# Altium PCB WARG EE Bootcamp.PcbDoc
Units mil, origin at the board's own origin, x right, y up, seen from the top; angles counter-clockwise.
Board outline 6000 x 4000 mil, 4 copper layers (Top Layer, GND, Vcc, Bottom Layer), stack 26.156 mil thick; 36 components, 24 nets, 152 pads, 0 vias.
Unrouted connection lines stored in the file: 82.
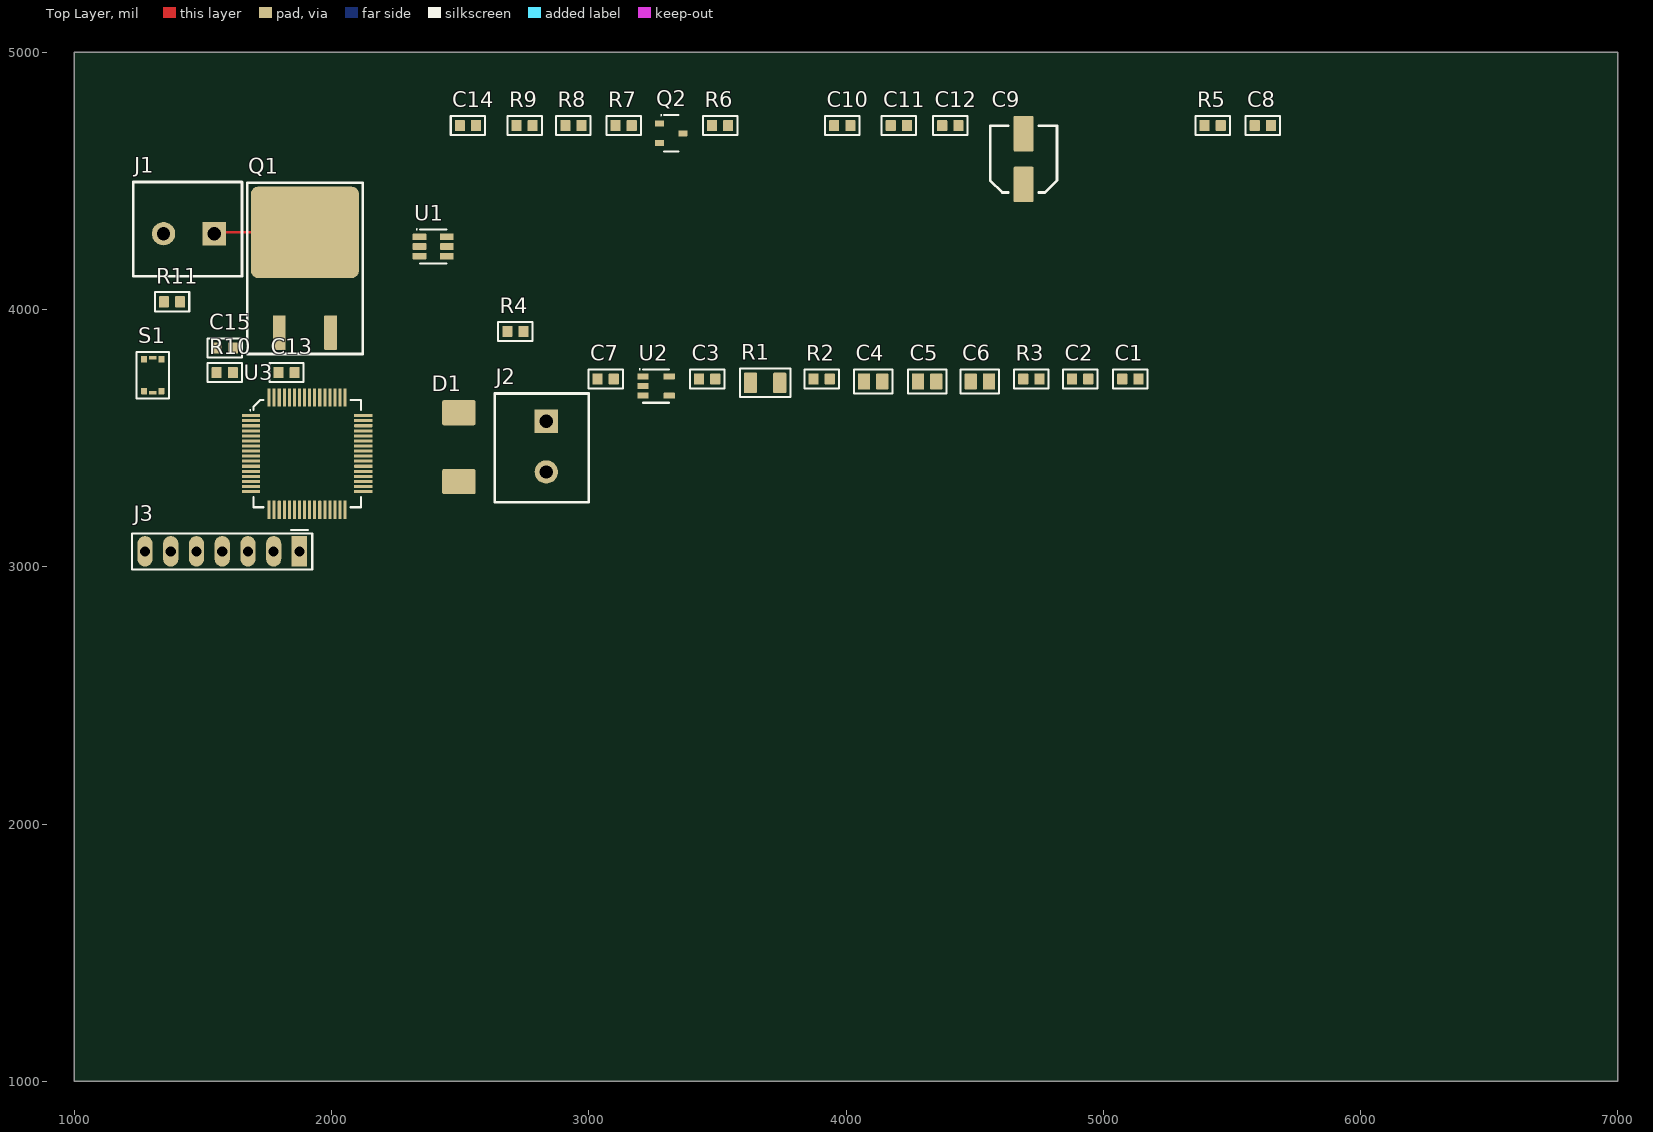
[diagram p0: Top Layer view]
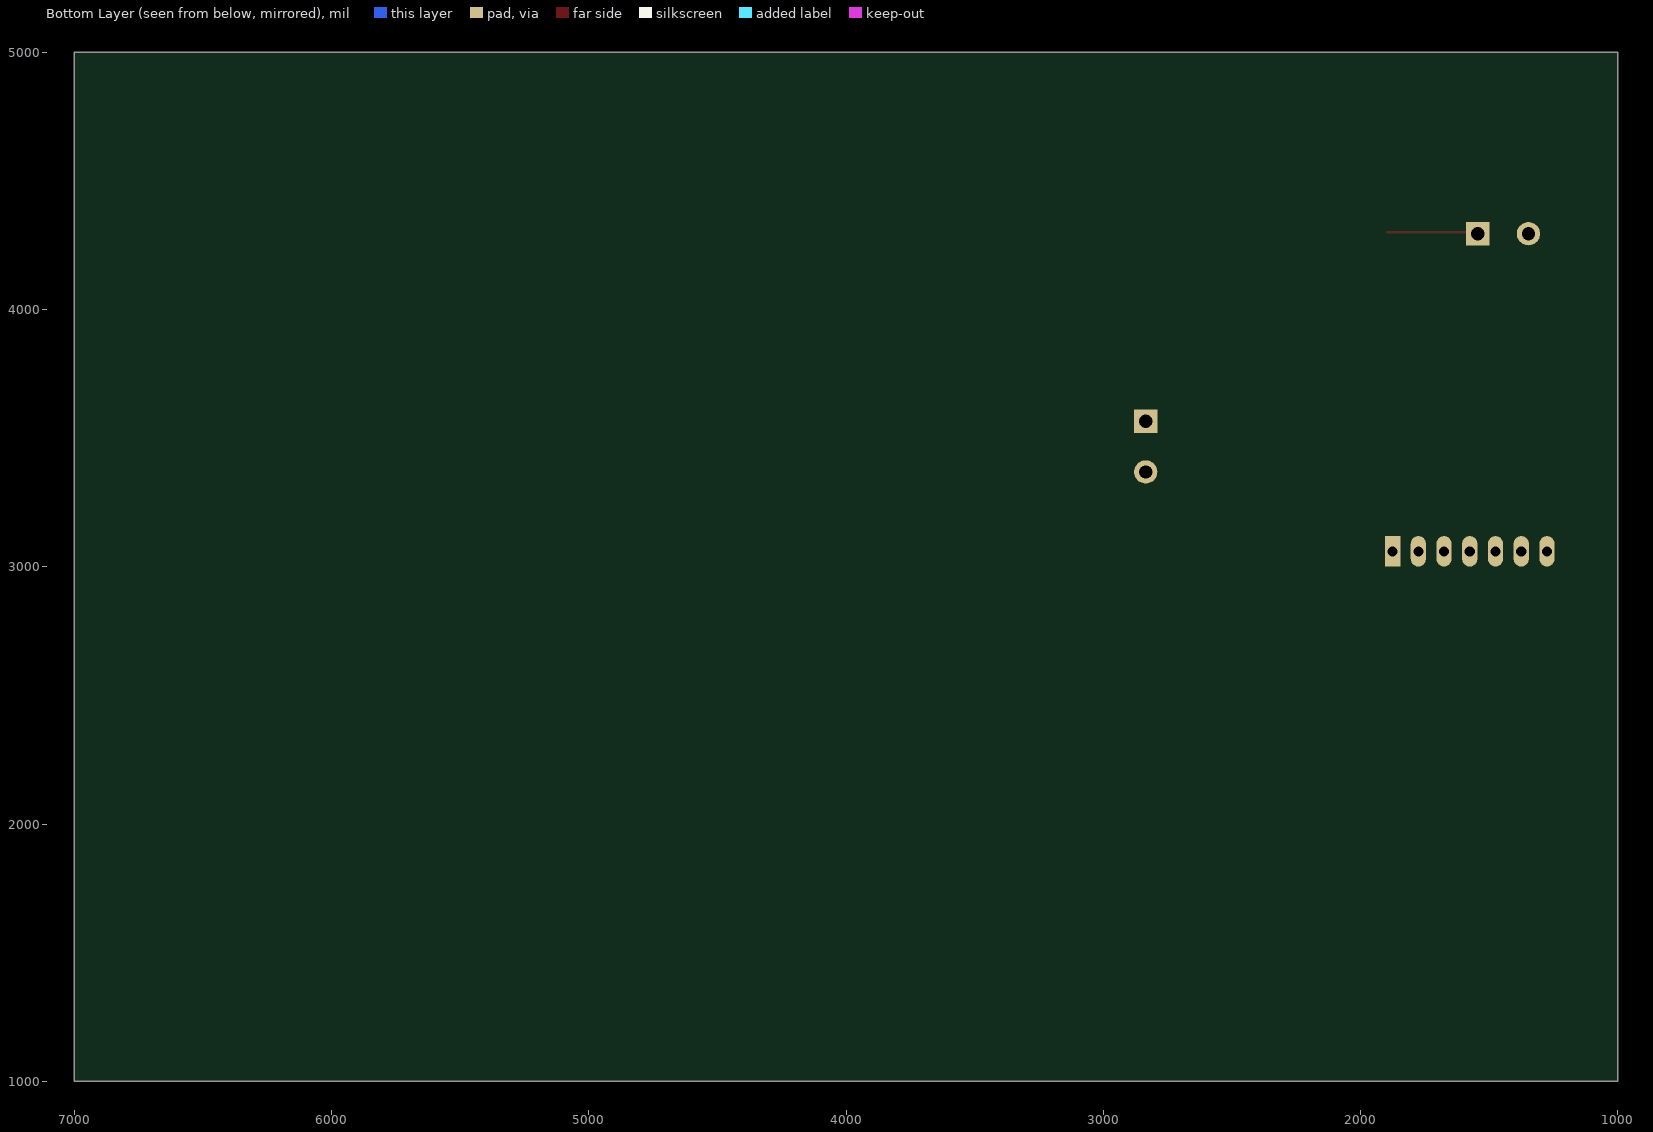
[diagram p1: Bottom Layer view, seen from below]
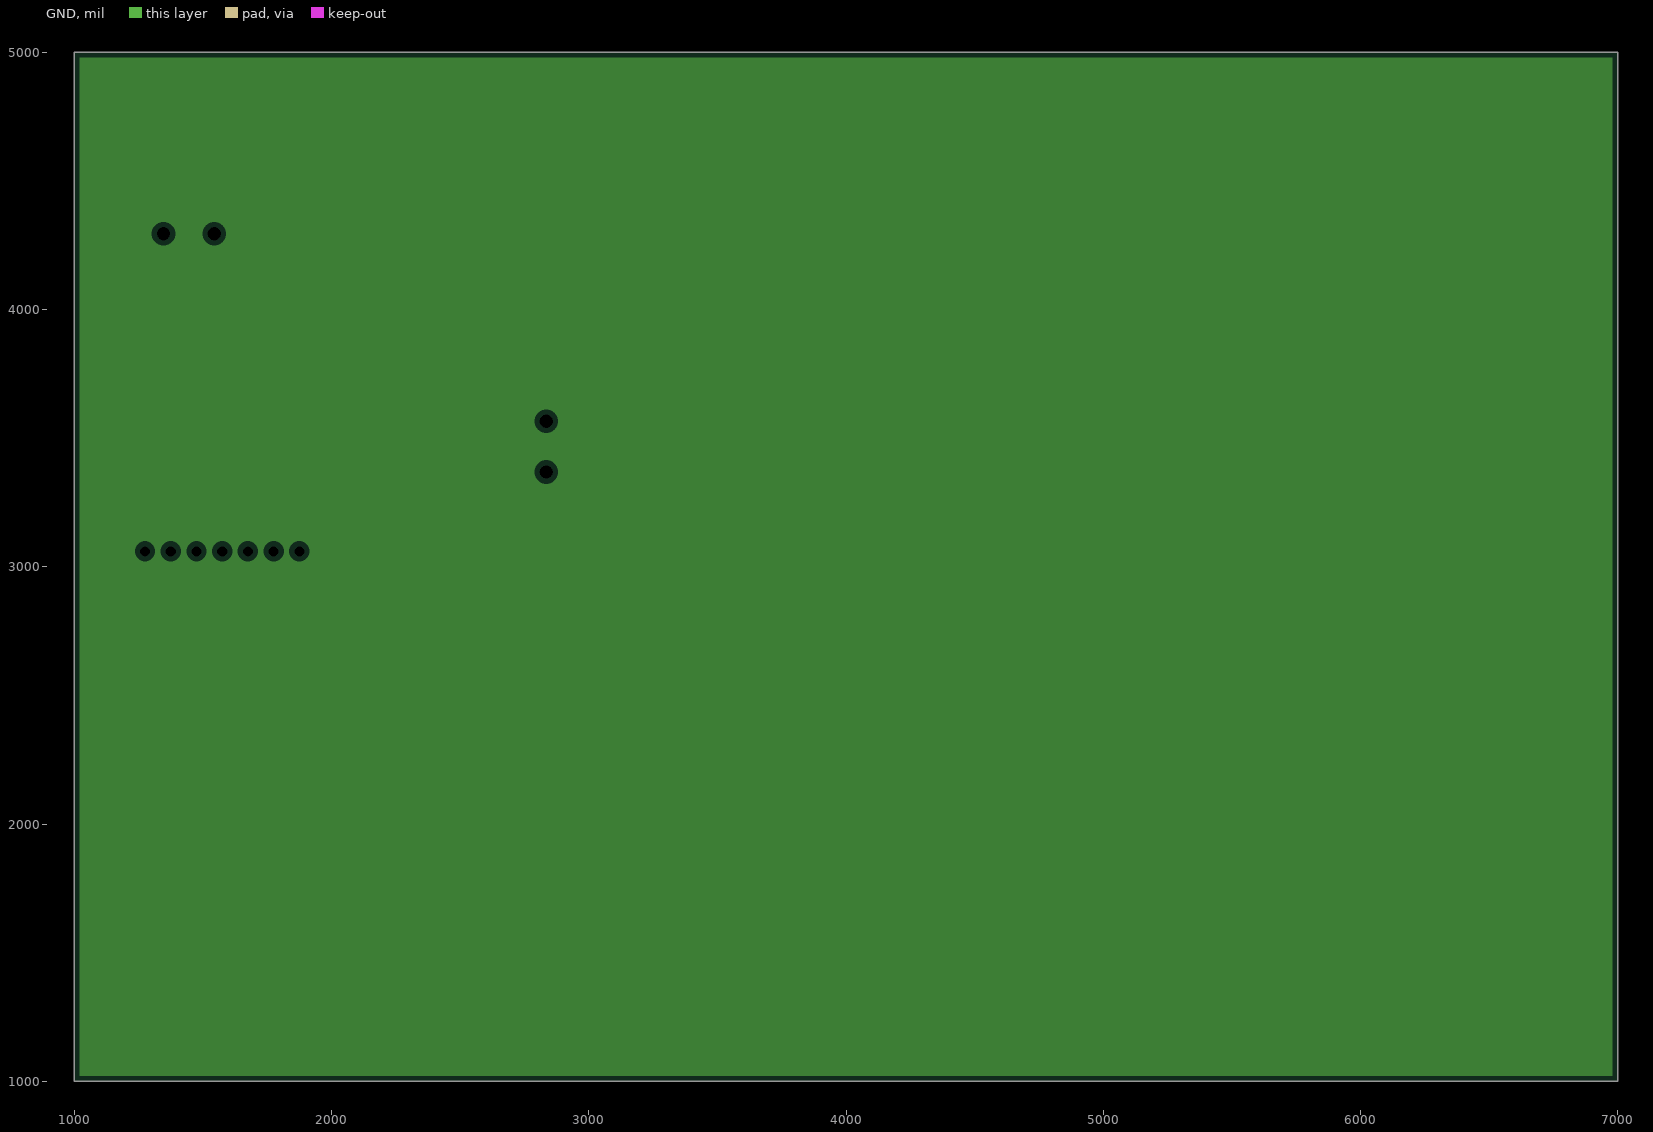
[diagram p2: GND, clearances drawn from the general rule]
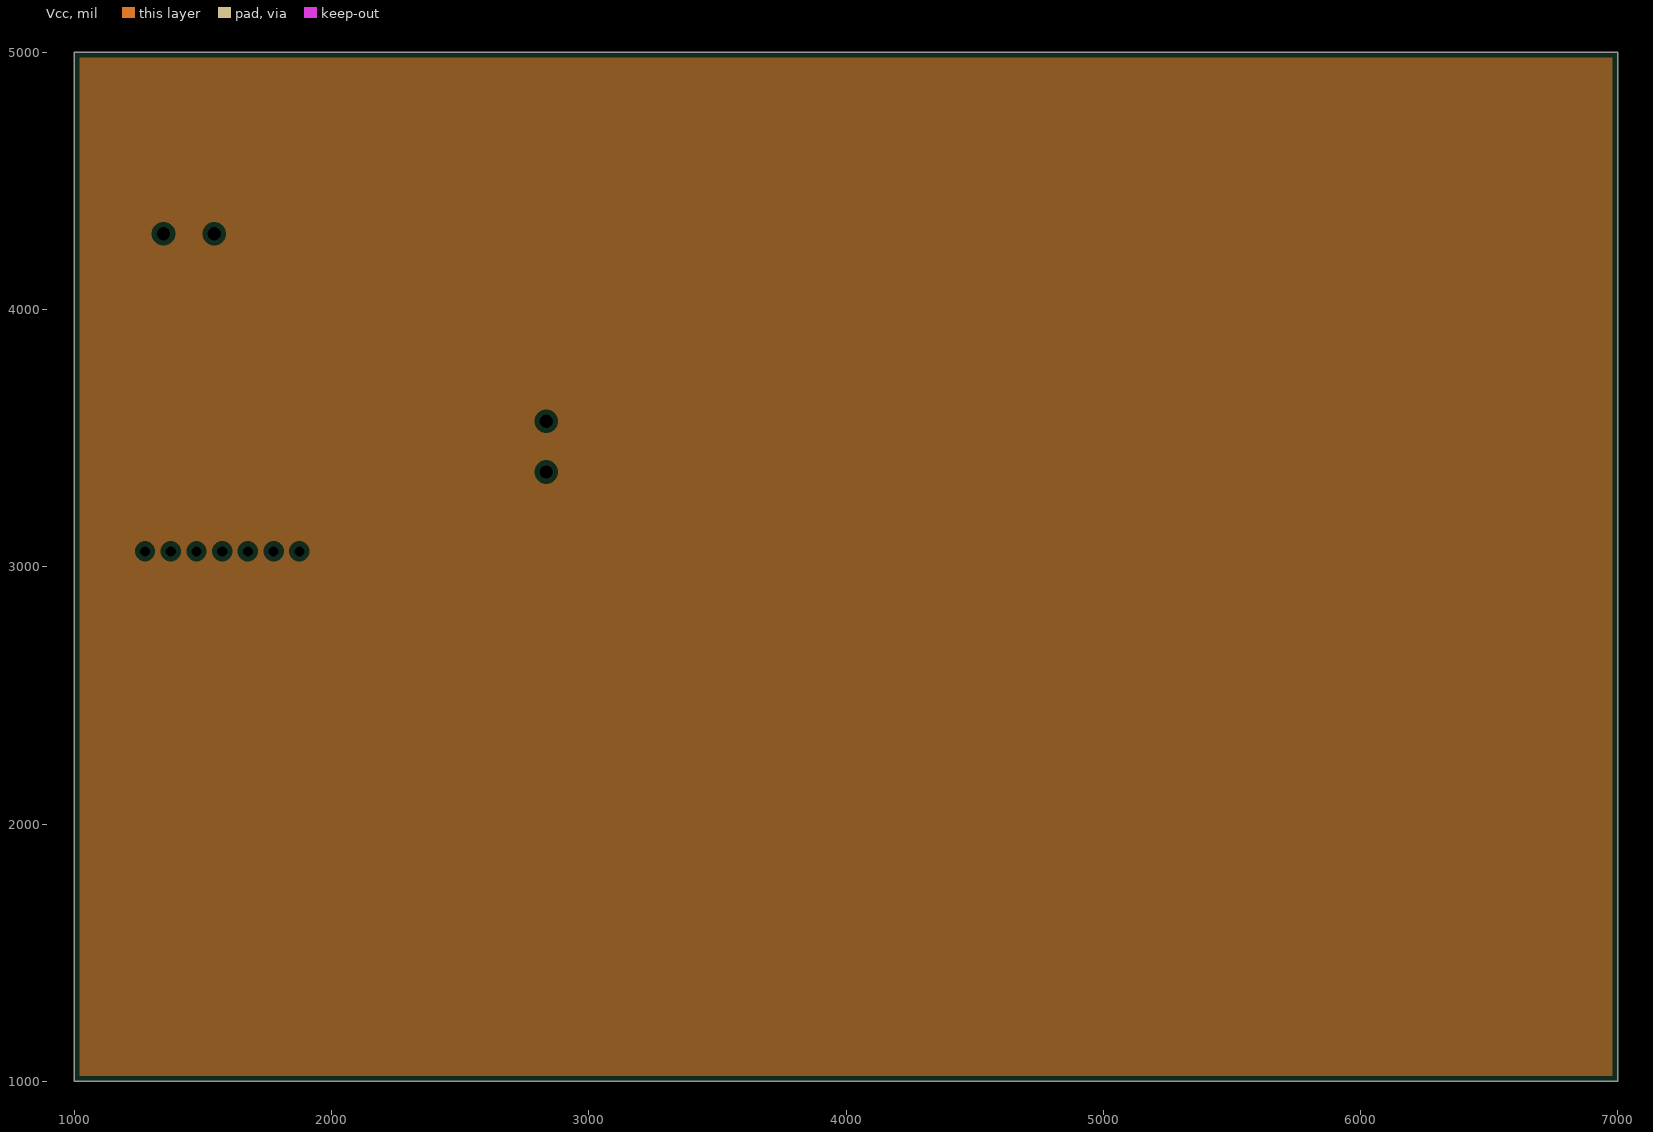
[diagram p3: Vcc, clearances drawn from the general rule]

## Layer stack, top to bottom
Top Solder: solder mask 0.4, Solder Resist, Dk 3.5
Top Layer: signal copper 1.4
Dielectric 2: core 4, Core-009, Dk 4.5
GND: plane copper 1.378
Dielectric 1: dielectric 12.6, FR-4, Dk 4.8
Vcc: plane copper 1.378
Dielectric 3: core 4, Core-009, Dk 4.5
Bottom Layer: signal copper 1.4
Bottom Solder: solder mask 0.4, Solder Resist, Dk 3.5

## Board outline
1000,1000 7000,1000 7000,5000 1000,5000

## Design rules (kind name [scope] priority, off if disabled: settings)
Clearance [All] p1: gap=10 ignorepadtopadclearanceinfootprint=FALSE except(0: Arc-Hole Track-Hole SMDPad-Hole THPad-Hole Via-Hole Fill-Hole Poly-Hole Region-Hole Text-Hole)
PlaneClearance [All] p1: clearance=20
PlaneConnect [All] p1: planeconnectstyle=Relief reliefexpansion=20 reliefentries=4 reliefconductorwidth=10 reliefairgap=10
PolygonConnect [All] p1: connectstyle=Relief reliefconductorwidth=10 reliefentries=4 polygonreliefangle="90 Angle" airgapwidth=10
RoomDefinition "WARG EE Bootcamp" [InComponentClass('WARG EE Bootcamp')] p1: confinementstyle=ConfineIn formatcopy=TRUE lockcomponents=FALSE outline 1140.43,4045 9890.43,4045 9890.43,4865 1140.43,4865
RoutingVias [All] p1: holewidth=28 width=50 viastyle="Through Hole" minholewidth=28 minwidth=50 maxholewidth=28 maxwidth=50
SolderMaskExpansion [All] p1: expansion=4 istentingtop=FALSE
Width [All] p1: maxlimit=10 minlimit=10 preferedwidth=10
28 further rules are at their usual default settings.

## Components (designator, comment, footprint, x,y, rotation, side; value= is the part's Value field where it differs from the comment)
C1 "CAP CER 0.1UF 25V X7R ±10% 0603" CAP0603 5105.43,3730 r0 top value=0.1uF
C2 "CAP CER 0.1UF 25V X7R ±10% 0603" CAP0603 4910.43,3730 r0 top value=0.1uF
C3 "CAP CER 3300PF 50V C0G/NP0 0603" CAP0603 3460.43,3730 r0 top value=3300pF
C4 "CAP CER 10UF 50V X5R ±10% 0805" CAP0805 4105.43,3720 r0 top value=10uF
C5 "CAP CER 10UF 50V X5R ±10% 0805" CAP0805 4315.43,3720 r0 top value=10uF
C6 "CAP CER 10UF 50V X5R ±10% 0805" CAP0805 4520.43,3720 r0 top value=10uF
C7 "CAP CER 0.1UF 25V X7R ±10% 0603" CAP0603 3065.43,3730 r0 top value=0.1uF
C8 "CAP CER 4.7UF 25V X6S ±10% 0603" CAP0603 5620.43,4715 r0 top value=4.7uF
C9 "CAP ALUM 100UF 20% 35V SMD" RADIAL_CORNELL_D 4690.43,4585 r0 top value=100µF
C10 "CAP CER 4.7UF 25V X6S ±10% 0603" CAP0603 3985.43,4715 r0 top value=4.7uF
C11 "CAP CER 0.1UF 25V X7R ±10% 0603" CAP0603 4205.43,4715 r0 top value=0.1uF
C12 "CAP CER 10000PF 50V X7R 0603" CAP0603 4405.43,4715 r0 top value=10000pF
C13 "CAP CER 20PF 50V C0G/NP0 0201" CAP0603 1825,3755 r0 top value=20pF
C14 "CAP CER 20PF 50V C0G/NP0 0201" CAP0603 2530.43,4715 r0 top value=20pF
C15 "CAP CER 0.1UF 25V X7R ±10% 0603" CAP0603 1585,3850 r0 top value=0.1uF
D1 "DIODE GEN PURP 600V 3A SMC" SMC 2495,3465 r90 top
J1 "CON_2POS_SCREW_TERM" 1935161 1445.28,4295 r180 top
J2 "CON_2POS_SCREW_TERM" 1935161 2835,3466.96 r270 top
J3 "CONN HEADER VERT 7POS 2.54MM" 0022284070 1875,3060 r180 top
Q1 "SUM110P04-04L-E3" "TO-263 (D²Pak)" 1896.39,4122.52 r0 top
Q2 "MOSFET N-CH 20V 6A SOT23-3L" SOT23-3 3320.43,4685 r0 top
R1 "" RES1206 3685.43,3715 r0 top value=0.01Ω
R2 "RES 10K OHM 1% 1/10W 0603" RES0603 3905.43,3730 r0 top value=10kΩ
R3 "RES 1K OHM 1% 1/10W 0603" RES0603 4720.43,3730 r0 top value=1kΩ
R4 "RES 10K OHM 1% 1/10W 0603" RES0603 2715,3915 r0 top value=10kΩ
R5 "RES 39K OHM 1% 1/10W 0603" RES0603 5425.43,4715 r0 top value=39kΩ
R6 "RES 10K OHM 1% 1/10W 0603" RES0603 3510.43,4715 r0 top value=10kΩ
R7 "RES 10K OHM 1% 1/10W 0603" RES0603 3135.43,4715 r0 top value=10kΩ
R8 "RES 30K OHM 1% 1/10W 0603" RES0603 2940.43,4715 r0 top value=30kΩ
R9 "RES 1K OHM 1% 1/10W 0603" RES0603 2750.43,4715 r0 top value=1kΩ
R10 "RES 39K OHM 1% 1/10W 0603" RES0603 1585,3755 r0 top value=39kΩ
R11 "RES 10K OHM 1% 1/10W 0603" RES0603 1380,4030 r0 top value=10kΩ
S1 "435151014824" 435151014824 1305,3745 r90 top
U1 "IC REG BUCK ADJ 5A TSOT23-6" SOT23-6 2395,4245 r0 top
U2 "IC CURR SENSE 1 CIRCUIT SOT23-5" SOT23-5 3210.43,3740 r0 top
U3 "IC MCU 32BIT 512KB FLASH 64LQFP" STM_LQFP64_N 1905,3440 r0 top

## Footprints (in the part's own frame and the unit in brackets; to place one, negate y for a bottom-side part, rotate by r counter-clockwise, add the part's x,y. Pads: shape width x height; smd on the part's side, far side on the other; paste and mask are expansions set on the pad)
1935161 [mm] "TERM BLK 2POS SIDE ENTRY 5MM PCB"
  rect 2.3x2.3 hole 1.325: 1(-2.5,0)
  round 2.3 hole 1.325: 2(2.5,0)
  silkscreen extent -5.25,-5.1 5.5,4.2, body extent -5.07,-4.94 5.33,4.06, height 11.41
0022284070 [mm] "CONN HEADER VERT 7POS 2.54MM"
  rect 1.508x3.016 hole 1: 1(0,0)
  oval 1.508x3.016 hole 1: 2(2.54,0) 3(5.08,0) 4(7.62,0) 5(10.16,0) 6(12.7,0) 7(15.24,0)
  silkscreen extent -1.27,-2.1 16.51,1.78, body extent -1.14,-1.17 16.39,1.17, height 10.8
435151014824 [mm]
  rrect15% 0.65x0.6 smd: 1(-1.575,0.85) 2(1.575,0.85) 3(1.575,-0.85) 4(-1.575,-0.85)
  rrect15% 0.35x0.7 smd: 5(1.725,0) 6(-1.725,0)
  silkscreen extent -2.3,-1.6 2.3,1.6, body extent -1.75,-1.35 1.75,1.35, height 1.6
CAP0603 [mm] "CAP0603 SMD"
  rrect15% 1x1.1 smd: 1(-0.8,0) 2(0.8,0)
  silkscreen extent -1.7,-0.95 1.7,0.95, body extent -0.87,-0.48 0.88,0.48, height 0.87
CAP0805 [mm] "CAP0805 SMD"
  rrect15% 1.2x1.6 smd: 1(-0.9,0) 2(0.9,0)
  silkscreen extent -1.9,-1.2 1.9,1.2, body extent -1.1,-0.73 1.1,0.72, height 1.39
RADIAL_CORNELL_D [mm] "Size D Radial SMD Capacitor"
  rrect15% 2x3.5 smd: 1(0,-2.5) 2(0,2.5)
  silkscreen extent -3.3,-3.3 3.3,3.3, body extent -3.3,-3.62 3.3,3.67, height 5.9
RES0603 [mm] "RES0603 SMD"
  rrect15% 1x1.1 smd: 1(-0.8,0) 2(0.8,0)
  silkscreen extent -1.7,-0.95 1.7,0.95, body extent -0.8,-0.4 0.8,0.4, height 0.46
RES1206 [mm] "RES1206 SMD"
  rrect15% 1.3x2 smd: 1(-1.45,0) 2(1.45,0)
  silkscreen extent -2.5,-1.4 2.5,1.4, body extent -1.6,-0.8 1.6,0.8, height 0.61
SMC [mm]
  rrect15% 2.5x3.3 smd: 1(-3.4,0) 2(3.4,0)
  body extent -3.97,-2.95 3.97,2.95, height 2.5
SOT23-3 [mm] "SOT23, 3-Leads, Body 2.90x2.30mm, Pitch 0.95mm, IPC Medium Density"
  rrect15% 0.9x0.6 smd: 1(-1.15,0.95) 2(-1.15,-0.95) 3(1.15,0)
  silkscreen extent -1.05,-1.8 0.7,1.85, body extent -1.3,-1.5 1.3,1.5, height 1.1
SOT23-5 [mm] "SOT23-5"
  rrect15% 1.1x0.6 smd: 1(0,0) 2(0,-0.95) 3(0,-1.9) 4(2.6,-1.9) 5(2.6,0)
  silkscreen extent -0.35,-2.6 2.6,0.75, body extent -0.1,-2.4 2.7,0.5, height 1.2
SOT23-6 [mm] "SOT23-6"
  rrect15% 1.35x0.65 smd mask+0.102: 1(-1.35,0.95) 2(-1.35,0) 3(-1.35,-0.95) 4(1.35,-0.95) 5(1.35,0) 6(1.35,0.95)
  silkscreen extent -1.65,-1.7 1.3,1.75, body extent -1.4,-1.45 1.4,1.45, height 1.45
STM_LQFP64_N [mm] "Thin QFP, 64-Leads, Body 10x10mm, Pitch 0.5mm, IPC Medium Density"
  rrect15% 1.8x0.3 smd mask+0.05: 1(-5.55,3.75) 2(-5.55,3.25) 3(-5.55,2.75) 4(-5.55,2.25) 5(-5.55,1.75) 6(-5.55,1.25) 7(-5.55,0.75) 8(-5.55,0.25) 9(-5.55,-0.25) 10(-5.55,-0.75) 11(-5.55,-1.25) 12(-5.55,-1.75) 13(-5.55,-2.25) 14(-5.55,-2.75) 15(-5.55,-3.25) 16(-5.55,-3.75) 33(5.55,-3.75) 34(5.55,-3.25) 35(5.55,-2.75) 36(5.55,-2.25) 37(5.55,-1.75) 38(5.55,-1.25) 39(5.55,-0.75) 40(5.55,-0.25) 41(5.55,0.25) 42(5.55,0.75) 43(5.55,1.25) 44(5.55,1.75) 45(5.55,2.25) 46(5.55,2.75) 47(5.55,3.25) 48(5.55,3.75)
  rrect15% 0.3x1.8 smd mask+0.05: 17(-3.75,-5.55) 18(-3.25,-5.55) 19(-2.75,-5.55) 20(-2.25,-5.55) 21(-1.75,-5.55) 22(-1.25,-5.55) 23(-0.75,-5.55) 24(-0.25,-5.55) 25(0.25,-5.55) 26(0.75,-5.55) 27(1.25,-5.55) 28(1.75,-5.55) 29(2.25,-5.55) 30(2.75,-5.55) 31(3.25,-5.55) 32(3.75,-5.55) 49(3.75,5.55) 50(3.25,5.55) 51(2.75,5.55) 52(2.25,5.55) 53(1.75,5.55) 54(1.25,5.55) 55(0.75,5.55) 56(0.25,5.55) 57(-0.25,5.55) 58(-0.75,5.55) 59(-1.25,5.55) 60(-1.75,5.55) 61(-2.25,5.55) 62(-2.75,5.55) 63(-3.25,5.55) 64(-3.75,5.55)
  silkscreen extent -5.65,-5.3 5.3,5.3, body extent -6,-5.99 6,6.01, height 1.56
"TO-263 (D²Pak)" [mil] "TO-263-3, D²Pak (2 Leads + Tab), TO-263AB"
  rrect15% 49.49x135 smd: 1(100,-212.52) 2(-100,-212.5)
  rrect15% 420x355 smd: 3(0,177.5)
  silkscreen extent -224,-295 224,370

## Part data
C1 C2 C7 C11 C15: library part GCM188R71E104KA57D, Manufacturer 1="Murata Electronics", Package=0603, Supplier Part Number 1=490-6051-1-ND, Temperature Coefficient=X7R, Tolerance=±10%, Voltage=25V, Manufacturer Part Number 1=GCM188R71E104KA57D, Mounting Type=SMD, Supplier 1=Digi-Key
C3: library part GRM1885C1H332JA01D, Manufacturer 1="Murata Electronics", Package=0603, Supplier Part Number 1=490-6385-1-ND, Temperature Coefficient=C0G, Tolerance=±5%, Voltage Rating=50V, ComponentLink1Description=https://datasheet.ciiva.com/6270/product-6270530.pdf?src-supplier=Digi-Key, ComponentLink1URL=https://datasheet.ciiva.com/6270/product-6270530.pdf?src-supplier=Digi-Key, ComponentLink2Description=https://datasheet.ciiva.com/29202/450783-da-01-en-vs-kondensator-0603-29202805.pdf?src-supplier=Conrad, ComponentLink2URL=https://datasheet.ciiva.com/29202/450783-da-01-en-vs-kondensator-0603-29202805.pdf?src-supplier=Conrad, ComponentLink3Description=https://datasheet.ciiva.com/5417/product-5417082.pdf?src-supplier=Mouser, ComponentLink3URL=https://datasheet.ciiva.com/5417/product-5417082.pdf?src-supplier=Mouser, Manufacturer Part Number 1=GRM1885C1H332JA01D, Mounting Type=SMD, Supplier 1=Digi-Key
C4 C5 C6: library part GRM21BR61H106KE43L, Manufacturer 1="Murata Electronics", Package=0805, Supplier Part Number 1=490-18663-1-ND, Temperature Coefficient=X5R, Tolerance=±10%, Voltage=50V, Manufacturer Part Number 1=GRM21BR61H106KE43L, Mounting Type="Surface Mount", Supplier 1=Digi-Key
C8 C10: library part GRM188C81E475KE11D, Manufacturer 1="Murata Electronics", Package=0603, Supplier Part Number 1=490-7199-1-ND, Temperature Coefficient=X6S, Tolerance=±10%, Voltage=25V, Manufacturer Part Number 1=GRM188C81E475KE11D, Mounting Type=SMD, Supplier 1=Digi-Key
C9: library part 35TKV100M8X10.5, Manufacturer 1=Rubycon, Supplier Part Number 1=1189-2074-1-ND, Tolerance=±20%, Voltage Rating=35V, Manufacturer Part Number 1=35TKV100M8X10.5, Mounting Type=SMD, Supplier 1=Digi-Key
C12: library part C0603C103J5RAC7867, Manufacturer 1=KEMET, Package=0603, Supplier Part Number 1=399-C0603C103J5RAC7867CT-ND, Temperature Coefficient=X7R, Tolerance=±5%, Voltage Rating=50V, Manufacturer Part Number 1=C0603C103J5RAC7867, Mounting Type=SMD, Supplier 1=Digi-Key
C13 C14: library part GRM0335C1H200GA01D, Manufacturer 1="Murata Electronics", Manufacturer Part Number 1=GRM1885C1H332JA01D, Package=0603, Supplier Part Number 1=490-6385-1-ND, Temperature Coefficient=C0G, Tolerance=±5%, Voltage Rating=50V, ComponentLink1Description=https://datasheet.ciiva.com/6270/product-6270530.pdf?src-supplier=Digi-Key, ComponentLink1URL=https://datasheet.ciiva.com/6270/product-6270530.pdf?src-supplier=Digi-Key, ComponentLink2Description=https://datasheet.ciiva.com/29202/450783-da-01-en-vs-kondensator-0603-29202805.pdf?src-supplier=Conrad, ComponentLink2URL=https://datasheet.ciiva.com/29202/450783-da-01-en-vs-kondensator-0603-29202805.pdf?src-supplier=Conrad, ComponentLink3Description=https://datasheet.ciiva.com/5417/product-5417082.pdf?src-supplier=Mouser, ComponentLink3URL=https://datasheet.ciiva.com/5417/product-5417082.pdf?src-supplier=Mouser, Mounting Type=SMD, Supplier 1=Digi-Key
D1: library part S3J-FDICT-ND, Average Rectified Current=3A, Continuous Reverse Voltage (Max)=600V, Forward Voltage=1.15V, Manufacturer 1="Diodes Incorporated", Manufacturer Part Number 1=S3J-13-F, Package=SMC, Reverse Leakage Current="10 μA @ 600V", Mounting Type="Surface Mount", Supplier 1=Digi-Key, Supplier Part Number 1=S3J-FDICT-ND
J1 J2: library part 1935161, "CONN SCREW TERMINAL 2X1 5MM RA TH", Manufacturer 1="Phoenix Contact", Supplier Part Number 1=277-1667-ND, Manufacturer Part Number 1=1935161, Mounting Type=TH, Pitch=5mm, Supplier 1=Digi-Key
J3: library part 0022032071, Manufacturer 1=Molex, Supplier Part Number 1=WM4005-ND, Connector Type=Header, Contact Type="Male Pin", Manufacturer Part Number 1=0022032071, Mounting Type="Through Hole", Number of Positions=7, Number of Rows=1, Pitch=2.54mm, Supplier 1=Digi-Key
Q2: library part AO3420, Continuous Drain Current (Id) TA=25°C=6A, Drain to Source Resistance On (Rds(on)) Max.=24mΩ, Drain to Source Voltage (Vdss) Max.=20V, Gate to Source Voltage (Vgs) Max. @ Vgs = 4.5V=±12V, Gate to Source Voltage Threshold (Vgs(th)) Max.=1V, Manufacturer 1="Alpha & Omega Semiconductor Inc.", Package=SOT23-3, Supplier Part Number 1=785-1014-1-ND, FET Type=N-Channel, Manufacturer Part Number 1=AO3420, Mounting Type=SMD, Supplier 1=Digi-Key
R1: library part PF1206FRF070R01L, "RES 0.01 OHM 1% 1/4W 1206", Manufacturer 1=YAGEO, Package=1206, Power Rating=1/4W, Supplier Part Number 1=311-0.01AJCT-ND, Tolerance=±1%, Manufacturer Part Number 1=PF1206FRF070R01L, Mounting Type=SMD, Supplier 1=Digi-Key
R2 R4 R6 R7 R11: library part RC0603FR-0710KL, Manufacturer 1=YAGEO, Package=0603, Power Rating=1/10W, Supplier Part Number 1=311-10.0KHRCT-ND, Tolerance=±1%, Manufacturer Part Number 1=RC0603FR-0710KL, Mounting Type=SMD, Supplier 1=Digi-Key
R3 R9: library part RC0603FR-071KL, Manufacturer 1=YAGEO, Package=0603, Power Rating=1/10W, Supplier Part Number 1=311-1.00KHRCT-ND, Tolerance=±1%, Manufacturer Part Number 1=RC0603FR-071KL, Mounting Type=SMD, Supplier 1=Digi-Key
R5 R10: library part RC0603FR-0739KL_1, Manufacturer 1=YAGEO, Manufacturer Part Number 1=RC0603FR-0730KL, Package=0603, Power Rating=1/10W, Supplier Part Number 1=311-30.0KHRCT-ND, Tolerance=±1%, Mounting Type=SMD, Supplier 1=Digi-Key
R8: library part RC0603FR-0730KL, Manufacturer 1=YAGEO, Package=0603, Power Rating=1/10W, Supplier Part Number 1=311-30.0KHRCT-ND, Tolerance=±1%, Manufacturer Part Number 1=RC0603FR-0730KL, Mounting Type=SMD, Supplier 1=Digi-Key
S1: "SMT 3.0 X 2.6 MM TACT SWITCH WIT", Manufacturer 1="Würth Elektronik", Supplier Part Number 1=732-435151014824CT-ND, Manufacturer Part Number 1=435151014824, Supplier 1=Digi-Key
U1: library part TPS565201DDCR, Manufacturer 1="Texas Instruments", Package=SOT-23-6, Supplier Part Number 1=296-49006-1-ND, Manufacturer Part Number 1=TPS565201DDCR, Mounting Type="Surface Mount", Supplier 1=Digi-Key
U2: library part INA180B1IDBVT, Manufacturer 1="Texas Instruments", Supplier Part Number 1=296-46631-1-ND, Manufacturer Part Number 1=INA180B1IDBVT, Supplier 1=Digi-Key
U3: library part STM32F446RET6, Manufacturer 1=STMicroelectronics, Supplier Part Number 1=497-15376-ND, Manufacturer Part Number 1=STM32F446RET6, Supplier 1=Digi-Key

## Nets (pads, with @x,y where several pads share a name; then routed paths per layer and width w, separated by ;. In a path a pad name is that pad's centre, name@x,y a point inside that pad or via, vN(x,y) a via of type N, cw(c..) or ccw(c..) an arc to the next point about the centre after c; other vN are vias at no path point)
+3V3: C1.1 C2.2 C7.2 C10.2 C11.2 C12.2 J3.1 R2.2 R10.2 U2.5 U3.1 U3.13 U3.19 U3.32 U3.48 U3.64
BUS_PROTECTED: Q1.1 R1.1 U2.1
BUS_UNPROTECTED: J1.1 Q1.3 | length 354.8
  Top Layer w10: J1.1 1548.72,4300.02 Q1.3
GND: C1.2 C3.1 C4.1 C5.1 C6.1 C7.1 C8.2 C9.2 C10.1 C11.1 C12.1 C13.1 C14.1 C15.1 J1.2 J3.7 Q1.2 Q2.1 R4.1 R6.1 R8.1 R11.1 S1.1 U1.1 U2.2 U3.12 U3.18 U3.31 U3.47 U3.63
IBUS_SENSE: C3.2 R3.2 U3.9
JTDI: J3.5 U3.50
JTDO/TRACESWO: J3.6 U3.55
NetC2_1: C2.1 U1.2
NetC8_1: C8.1 U3.30
NetC13_2: C13.2 U3.5
NetC14_2: C14.2 R9.1
NetD1_1: D1.1 J2.2 Q2.3
NetL1_1: U1.6
NetQ2_2: Q2.2 R7.2 R8.2
NetR2_1: R2.1 R4.2 U1.4
NetR3_1: R3.1 U2.4
NetR7_1: R7.1 U3.26
NetR9_2: R9.2 U3.6
NetR11_2: R11.2 U3.60
NRST: C15.2 J3.2 R10.1 S1.2 U3.7
SWCLK: J3.4 U3.49
SWDIO: J3.3 U3.46
VBUS: C4.2 C5.2 C6.2 C9.1 D1.2 J2.1 R1.2 R5.2 U1.3 U1.5 U2.3
VBUS_SENSE: R5.1 R6.2 U3.8
pads on no net: S1.3 S1.4 S1.5 S1.6 U3.2 U3.3 U3.4 U3.10 U3.11 U3.14 U3.15 U3.16 U3.17 U3.20 U3.21 U3.22 U3.23 U3.24 U3.25 U3.27 U3.28 U3.29 U3.33 U3.34 U3.35 U3.36 U3.37 U3.38 U3.39 U3.40 U3.41 U3.42 U3.43 U3.44 U3.45 U3.51 U3.52 U3.53 U3.54 U3.56 U3.57 U3.58 U3.59 U3.61 U3.62

## Polygon pours and split planes (outlines as drawn)
no net on GND (split plane): 6979.9,1020.1 1020.1,1020.1 1020.1,4979.9 6979.9,4979.9
no net on Vcc (split plane): 6979.9,1020.1 1020.1,1020.1 1020.1,4979.9 6979.9,4979.9